# Allegro board Templet_16x.brd
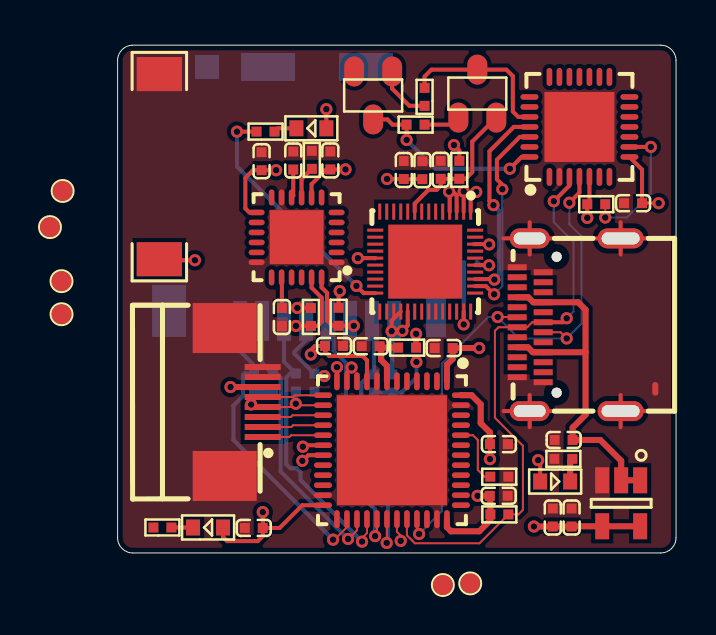
[diagram p0: board, top side]
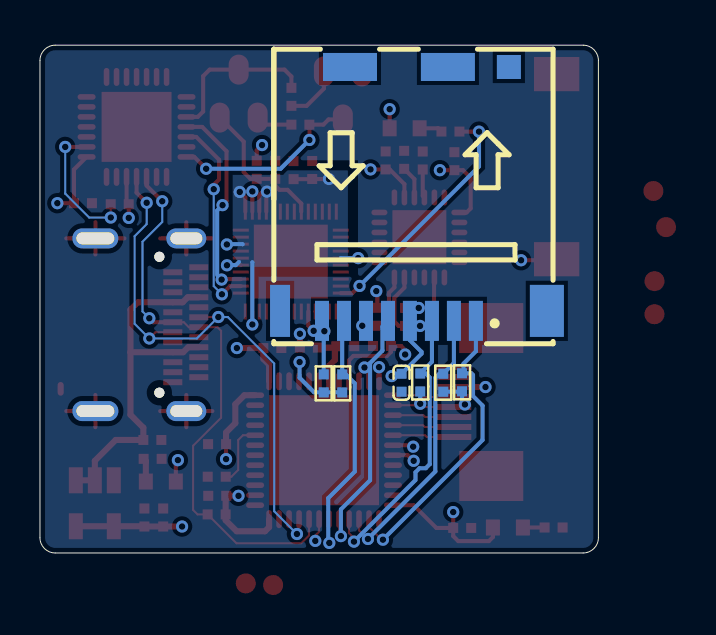
[diagram p1: board, bottom side, seen from below]

Outline 27.94 x 25.4 mm; copper layers: TOP, 3V3, GND, BOTTOM. Coordinates in mm from the lower left corner of the outline.
Outline path: 0,24.64 0,0.76 arc(0.22,0.22) 0.76,0 27.18,0 arc(27.72,0.22) 27.94,0.76 27.94,24.64 arc(27.72,25.18) 27.18,25.4 0.76,25.4 arc(0.22,25.18) 0,24.64

## Placement (name value [footprint] x y rotation side)
C1  0.1uf  [C0402]  21.77 1.77 90 top
C2  0.1uf  [C0402]  22.32 5.65 180 top
C3  10uf  [C0402]  22.71 1.77 90 top
C4  1uF  [C0402]  14.32 19.16 90 top
C5  0.1uf  [C0402]  15.25 19.15 90 top
C6  0.1uf  [C0402]  25.79 17.5 0 top
C7  0.1uf  [C0402]  16.17 19.17 90 top
C8  0.1uf  [C0402]  19.07 2.86 0 top
C9  0.1uf  [C0402]  10.83 10.35 0 top
C10  0.1uf  [C0402]  6.81 1.25 180 top
C11  0.1uf  [C0402]  16.31 10.25 180 top
C12  0.1uf  [C0402]  19.08 5.44 0 top
C13  2.2uF  [C0402]  8.22 11.8 90 top
C14  0.1uf  [C0402]  10.64 19.64 90 top
C15  0.1uf  [C0402]  12.66 10.34 180 top
C16  10nF  [C0402]  7.2 19.6 90 top
C17  0.1uf  [C0402]  8.79 19.63 90 top
C18  0.1uf  [C0402]  9.85 8.52 90 bottom
D1  LED  [LED0603]  9.69 21.24 180 top
D2  LED  [LED0603]  4.53 1.27 180 top
D3  LED  [LED0603]  21.89 3.57 0 top
J1  ANT  [ANT-SMD_L9_5-W2_1]  2.09 19.32 90 top
J2  HEADER 10  [FPC-SMD_KH-FG0_5-H2_0-8PIN]  6.31 7.55 90 top
J3  HEADER 1  [TPC_1R00]  -2.81 13.6 0 top
J4  HEADER 1  [TPC_1R00]  -2.8 11.94 0 top
J5  HEADER 1  [TPC_1R00]  17.64 -1.52 0 top
J6  HEADER 1  [TPC_1R00]  16.27 -1.6 0 top
J7  HEADER 1  [TPC_1R00]  -3.38 16.3 0 top
J8  HEADER 1  [TPC_1R00]  -2.75 18.11 0 top
Q1  NPN BCE  [SOT23_3L]  18 22.98 0 top
Q2  NPN BCE  [SOT23_3L]  12.79 22.89 180 top
R1  10K  [R0402]  17.1 19.17 270 top
R2  10K  [R0402]  23.95 17.44 0 top
R3  10K  [R0402]  14.91 21.43 0 top
R4  200R  [R0402]  7.4 21.08 180 top
R5  10K  [R0402]  15.36 22.82 270 top
R6  200R  [R0402]  2.24 1.27 180 top
R7  200R  [R0402]  22.3 4.71 180 top
R8  10K  [R0402]  19.1 3.81 0 top
R9  4.7K  [R0402]  9.67 11.81 270 top
R10  4.7K  [R0402]  11.06 11.82 270 top
R11  4.7K  [R0402]  19.1 1.93 180 top
R12  10K  [R0402]  14.48 10.27 180 top
R13  4.7K  [R0402]  9.72 19.66 90 top
R14  4.7K  [R0402]  6.82 8.53 270 bottom
R15  4.7K  [R0402]  7.76 8.52 270 bottom
R16  4.7K  [R0402]  8.92 8.53 270 bottom
R17  4.7K  [R0402]  12.82 8.48 270 bottom
R18  4.7K  [R0402]  13.74 8.48 270 bottom
U1  -  [SOT23-5]  25.2 2.48 180 top
U2  type-c-24p  [USB-C-SMD_TYPE-C-24P-QT]  22.58 11.42 90 top
U3  cp2102  [QFN-28_L5_0-W5_0-P0_50-BL-EP]  23.11 21.31 0 top
U4  ESP32-DOWD  [QFN-48_L5_0-W5_0-P0_35-BL-EP3_7]  15.39 14.57 180 top
U5  STM32F411xD/Exx UFQFPN48  [UFQFPN-48_L7_0-W7_0-P0_50-BL-EP]  13.73 5.14 180 top
U6  MPU6050  [QFN-24_L4_0-W4_0-P0_50-BL-EP2_7]  8.96 15.78 90 top
U7  TF/MicroSD  [TF-SMD_DM3CS-SF]  9.25 17.96 180 bottom

## Library data of the parts
C1-C12 = CAP NP: signal model: CAP_0402_1.01UF_16V_C0402_100NF_100nF
C13-C18 = CAP NP
D1-D3 = LED
J1 = HEADER 2
J2 = HEADER 10
J3-J8 = HEADER 1
Q1 Q2 = NPN BCE
R1-R18 = R
U1 = SOT23-5
U2 = type-c-24p
U3 = cp2102
U4 = ESP32-DOWD
U5 = STM32F401xD/Exx UFQFPN48
U6 = MPU6050
U7 = TF/MicroSD

## Footprints (pads in the part's own frame, mm; a bottom-side part is the same pattern mirrored in y, then rotated)
ANT-SMD_L9_5-W2_1
  rect 1.71x2.268 smd: 1(-4.63,0) 2(4.63,0)
C0402
  rect 0.5x0.5 smd: 1(-0.45,0) 2(0.45,0)
FPC-SMD_KH-FG0_5-H2_0-8PIN
  rect 0.3x1.8 smd: 1(-1.75,-0.95) 2(-1.25,-0.95) 3(-0.75,-0.95) 4(-0.25,-0.95) 5(0.25,-0.95) 6(0.75,-0.95) 7(1.25,-0.95) 8(1.75,-0.95)
  rect 2.5x3.2 smd: 9(3.7,0.95) 10(-3.7,0.95)
LED0603
  rect 0.7x0.8 smd: 1(-0.75,0) 2(0.75,0)
QFN-24_L4_0-W4_0-P0_50-BL-EP2_7
  oval 0.28x0.8 smd: 1(-1.25,-2) 2(-0.75,-2) 3(-0.25,-2) 4(0.25,-2) 5(0.75,-2) 6(1.25,-2) 13(1.25,2) 14(0.75,2) 15(0.25,2) 16(-0.25,2) 17(-0.75,2) 18(-1.242,2)
  oval 0.8x0.28 smd: 7(2,-1.25) 8(2,-0.75) 9(2,-0.25) 10(2,0.25) 11(2,0.75) 12(2,1.25) 19(-2,1.25) 20(-2,0.75) 21(-2,0.25) 22(-2,-0.25) 23(-2,-0.75) 24(-2,-1.25)
  rect 2.7x2.7 smd: 25(0.012,0)
QFN-28_L5_0-W5_0-P0_50-BL-EP
  oval 0.28x0.9 smd: 1(-1.501,-2.5) 2(-1.001,-2.5) 3(-0.5,-2.5) 4(0,-2.5) 5(0.5,-2.5) 6(1.001,-2.5) 7(1.501,-2.5) 15(1.501,2.5) 16(1.001,2.5) 17(0.5,2.5) 18(0,2.5) 19(-0.5,2.5) 20(-1.001,2.5) 21(-1.501,2.5)
  oval 0.9x0.28 smd: 8(2.5,-1.501) 9(2.5,-1.001) 10(2.5,-0.5) 11(2.5,0) 12(2.5,0.5) 13(2.5,1.001) 14(2.5,1.501) 22(-2.5,1.501) 23(-2.5,1.001) 24(-2.5,0.5) 25(-2.5,0) 26(-2.5,-0.5) 27(-2.5,-1.001) 28(-2.5,-1.501)
  rect 3.5x3.5 smd: 29(0,0)
QFN-48_L5_0-W5_0-P0_35-BL-EP3_7
  rect 0.15x0.8 smd: 1(-2.275,-2.5) 2(-1.925,-2.5) 3(-1.575,-2.5) 4(-1.225,-2.5) 5(-0.875,-2.5) 6(-0.525,-2.5) 7(-0.175,-2.5) 8(0.175,-2.5) 9(0.525,-2.5) 10(0.875,-2.5) 11(1.225,-2.5) 12(1.575,-2.5) 13(1.925,-2.5) 14(2.275,-2.5) 25(2.275,2.5) 26(1.925,2.5) 27(1.575,2.5) 28(1.225,2.5) 29(0.875,2.5) 30(0.525,2.5) 31(0.175,2.5) 32(-0.175,2.5) 33(-0.525,2.5) 34(-0.875,2.5) 35(-1.225,2.5) 36(-1.575,2.5) 37(-1.925,2.5) 38(-2.275,2.5)
  rect 0.8x0.15 smd: 15(2.5,-1.575) 16(2.5,-1.225) 17(2.5,-0.875) 18(2.5,-0.525) 19(2.5,-0.175) 20(2.5,0.175) 21(2.5,0.525) 22(2.5,0.875) 23(2.5,1.225) 24(2.5,1.575) 39(-2.5,1.575) 40(-2.5,1.225) 41(-2.5,0.875) 42(-2.5,0.525) 43(-2.5,0.175) 44(-2.5,-0.175) 45(-2.5,-0.525) 46(-2.5,-0.875) 47(-2.5,-1.225) 48(-2.5,-1.575)
  rect 3.7x3.7 smd: 49(0,0)
R0402
  rect 0.5x0.5 smd: 1(-0.45,0) 2(0.45,0)
SOT23-5
  rect 0.7x1.3 smd: 1(-0.95,-1.15) 2(0,-1.15) 3(0.95,-1.15) 4(0.95,1.15) 5(-0.95,1.15)
SOT23_3L
  oval 1x1.5 smd: 1(-0.95,-1.2) 2(0.95,-1.2) 3(0,1.2)
TF-SMD_DM3CS-SF
  rect 0.7x2 smd: 1(3.125,-6.35) 2(2.025,-6.35) 3(0.925,-6.35) 4(-0.177,-6.35) 5(-1.275,-6.35) 6(-2.375,-6.35) 7(-3.475,-6.35) 8(-4.575,-6.35)
  rect 2.7x1.4 smd: 9(1.724,6.35) 12(-3.176,6.35)
  rect 1.7x2.6 smd: 10(6.675,-5.851)
  rect 1x2.6 smd: 11(-6.675,-5.851)
  rect 1.2x1.2 smd: 13(4.775,6.35)
TPC_1R00
  round 1 smd: 1(0,0)
UFQFPN-48_L7_0-W7_0-P0_50-BL-EP
  oval 0.28x0.9 smd: 1(-2.751,-3.449) 2(-2.25,-3.449) 3(-1.75,-3.449) 4(-1.249,-3.449) 5(-0.749,-3.449) 6(-0.249,-3.449) 7(0.249,-3.449) 8(0.75,-3.449) 9(1.25,-3.449) 10(1.75,-3.449) 11(2.251,-3.449) 12(2.751,-3.449) 25(2.751,3.449) 26(2.251,3.449) 27(1.75,3.449) 28(1.25,3.449) 29(0.75,3.449) 30(0.249,3.449) 31(-0.249,3.449) 32(-0.749,3.449) 33(-1.249,3.449) 34(-1.75,3.449) 35(-2.25,3.449) 36(-2.751,3.449)
  oval 0.9x0.28 smd: 13(3.45,-2.751) 14(3.45,-2.25) 15(3.45,-1.75) 16(3.45,-1.25) 17(3.45,-0.749) 18(3.45,-0.249) 19(3.45,0.249) 20(3.45,0.749) 21(3.45,1.25) 22(3.45,1.75) 23(3.45,2.25) 24(3.45,2.751) 37(-3.449,2.751) 38(-3.449,2.25) 39(-3.449,1.75) 40(-3.449,1.25) 41(-3.449,0.749) 42(-3.449,0.249) 43(-3.449,-0.249) 44(-3.449,-0.749) 45(-3.449,-1.25) 46(-3.449,-1.75) 47(-3.449,-2.25) 48(-3.449,-2.751)
  rect 5.5x5.5 smd: 49(0,0)
USB-C-SMD_TYPE-C-24P-QT
  round 0.5 hole 0.5: (-3.4,0.613) (3.4,0.613)
  oval 1x2 hole 0.6x1.6: 1(-4.32,1.962) 2(4.32,1.962)
  oval 1x2.3 hole 0.6x1.9: 3(4.32,-2.587) 4(-4.32,-2.587)
  rect 0.3x0.95 smd: A1(-2.625,2.587) A2(-2.125,2.587) A3(-1.625,2.587) A4(-1.125,2.587) A5(-0.625,2.587) A6(-0.125,2.587) A7(0.375,2.587) A8(0.875,2.587) A9(1.375,2.587) A10(1.875,2.587) A11(2.375,2.587) A12(2.875,2.587) B1(2.625,1.288) B2(2.125,1.288) B3(1.625,1.288) B4(1.125,1.288) B5(0.625,1.288) B6(0.125,1.288) B7(-0.375,1.288) B8(-0.875,1.288) B9(-1.375,1.288) B10(-1.875,1.288) B11(-2.375,1.288) B12(-2.875,1.288)

## Nets
3V3: C1.1 C3.1 C4.1 C5.1 C6.2 C8.1 C9.1 C10.1 C11.1 C12.1 C14.1 C16.1 C18.2 D1.1(+) D2.1(+) D3.1(+) J2.6 J7.1 R1.1 R2.1 R9.1 R10.1 R11.2 R12.1 R14.2 R15.2 R16.2 R17.2 R18.2 U1.4(OUT) U1.5(FB) U3.5(D-) U3.6(VDD) U3.8(VBUS) U4.1(VDDA#1) U4.3(VDD3P3#3) U4.4(VDD3P3#4) U4.19(VDD3P3_RTC) U4.37(VDD3P3_CPU) U4.43(VDDA#43) U4.46(VDDA#46) U5.1(VBAT) U5.9(VDDA/VREF+) U5.24(VDD#24) U5.36(VDD#36) U5.48(VDD#48) U6.8(VLOGIC) U6.13(VDD) U7.4(VDD)
GND: C1.2 C2.2 C3.2 C4.2 C5.2 C6.1 C7.2 C8.2 C9.2 C10.2 C11.2 C12.2 C13.1 C14.2 C15.2 C16.2 C17.2 C18.1 J1.2 J2.7 J2.8 J2.9 J2.10 J8.1 R7.2 R8.2 R13.2 U1.3(GND) U2.1(EP#1) U2.2(EP#2) U2.3(EP#3) U2.4(EP#4) U2.A1(GND#A1) U2.A12(GND#A12) U2.B1(GND#B1) U2.B12(GND#B12) U3.2(RI) U3.29(HEAT_TAB) U5.8(VSSA/VREF-) U5.23(VSS#23) U5.35(VSS#35) U5.47(VSS#47) U5.49(GND) U6.1(CLKIN) U6.11(FSYNC) U6.18(GND#18) U6.25(GND#25) U7.6(VSS) U7.10 U7.11 U7.12 U7.13
VDD_5V: C2.1 U1.1(IN) U1.2(EN) U2.A4(VBUS#A4) U2.A9(VBUS#A9) U2.B4(VBUS#B4) U2.B9(VBUS#B9)
BLK: J2.1 U5.17(PA7)
CC1: U2.A5(CC1)
CC2: U2.B5(CC2)
DC: J2.2 U5.16(PA6)
DTR: Q2.3(E) R3.1 U3.28(DTR)
E32_IO4: R4.2 U4.24(GPIO4)
E32_U0RXD: U3.26(TXD) U4.40(U0RXD)
E32_U0TXD: U3.25(RXD) U4.41(U0TXD)
E32_U1RXD: J4.1 U4.28(SD_DATA_2) U5.12(PA2)
E32_U1TXD: J3.1 U4.29(SD_DATA_3) U5.11(PA1)
EN: C7.1 Q1.2(C) R1.2 U4.9(CHIP_PU)
GPIO0: Q2.2(C)
MPU_SCL: R9.2 U5.19(PB1) U6.23(SCL)
MPU_SDA: R10.2 U5.18(PB0) U6.24(SDA)
RES: J2.3 U5.15(PA5)
RESV1: U6.22(RESV1)
RESV2: U6.21(RESV2)
RESV3: U6.19(RESV3)
RTS: Q1.3(E) R5.1 U3.24(RTS)
RX1+: U2.B11(RX1+)
RX1-: U2.B10(RX1-)
RX2+: U2.A11(RX2+)
RX2-: U2.A10(RX2-)
SCL: J2.5 U5.13(PA3)
SDA: J2.4 U5.14(PA4)
SDIO_CLK: U5.29(PA8) U7.5(CLK)
SDIO_CMD: R16.1 U5.28(PB15) U7.3(CMD)
SDIO_D0: R17.1 U5.30(PA9) U7.7(DATA0)
SDIO_D1: R18.1 U5.31(PA10) U7.8(DATA1)
SDIO_D2: R14.1 U5.26(PB13) U7.1(DAT2)
SDIO_D3: R15.1 U5.27(PB14) U7.2(DATA3/CD)
ST_PA14: R6.2
ST_SWCLK: J5.1 U5.37(PA14)
ST_SWDIO: J6.1 U5.34(PA13)
SUB1: U2.A8(SUB1)
SUB2: U2.B8(SUB2)
TX1+: U2.A2(TX1+)
TX1-: U2.A3(TX1-)
TX2+: U2.B2(TX2+)
TX2-: U2.B3(TX2-)
USB-D+: U2.A7(D-#A7) U2.B7(D-#B7) U3.4(D+) U5.33(PA12)
USB-D-: R11.1 U2.A6(D+#A6) U2.B6(D+#B6) U3.3(GND) U5.32(PA11)
N05093: R2.2 U3.9(RST)
N06006: J1.1 U4.2(LAN_IN)
N16435: Q1.1(B) R3.2
N16447: Q2.1(B) R5.2
N22150: C15.1 R12.2 U5.7(NRST)
N26946: C13.2 U6.20(CPOUT)
N28132: C17.1 U6.10(REGOUT)
N29778: R13.1 U6.9(AD0)
N53835: D1.2(-) R4.1
N53839: D2.2(-) R6.1
N53846: D3.2(-) R7.1
N101946: R8.1 U5.44(BOOT0)

Pads without a net: U3 1 7 10 11 12 13 14 15 16 17 18 19 20 21 22 23 27; U4 5 6 7 8 10 11 12 13 14 15 16 17 18 20 21 22 23 25 26 27 30 31 32 33 34 35 36 38 39 42 44 45 47 48 49; U5 2 3 4 5 6 10 20 21 22 25 38 39 40 41 42 43 45 46; U6 2 3 4 5 6 7 12 14 15 16 17; U7 9

## Via types
v1: diameter 0.61, hole 0.33, TOP to BOTTOM, 60 vias

## Routing (per net, layer and track width the routed paths; a pad name or vN(x,y) marks a point on that pad's centre or on a via; arc(x,y) is an arc through that point)
3V3: length 71
  TOP w0.203: D1.1 v1(10.44,22.2) ; C5.1 14.33,18.7 C4.1 v1(13.48,18.71) ; U4.3 16.97,17.89 16.78,18.07 v1(16.58,18.07) 16.62,18.04 U4.4 ; U3.5 23.61,17.55 R2.1 v1(23.5,16.76) ; v1(11.4,19.19) C14.1 10.44,19.19 9.71,18.45 U6.8 ; C10.1 7.26,0.84 7.01,0.59 5.48,0.59 5.28,0.8 D2.1 ; C10.1 8.11,1.25 9.24,2.39 U5.24 ; C10.1 v1(7.26,2.05) ; v1(18.58,14.39) 18.58,14.4 U4.43 ; R10.1 11.06,13.05 v1(11.11,13.1) ; R9.1 v1(8.99,12.26) ; U4.46 18.57,15.45 v1(18.59,15.43) ; v1(21.04,4.64) 21.14,4.54 D3.1 ; v1(27.07,17.5) C6.2 26.24,19.18 U3.8 ; U4.19 v1(12.02,14.75) ; v1(16.83,20.41) 17.1,20.14 R1.1 ; U4.1 17.67,17.78 v1(17.94,18.06) ; C12.1 v1(18.63,4.69) ; U5.9 12.48,9.64 12.26,9.86 10.58,9.86 10.38,10.06 C9.1 9.87,10.35 9.67,10.15 v1(9.67,9.93) ; v1(7.93,19.15) C16.1 6.77,19.15 6.39,18.77 6.39,17.24 6.59,17.03 U6.13 ; U4.37 v1(17.32,11.43)
  TOP w0.305: v1(20.83,1.32) C1.1 C3.1 22.73,1.33 U1.4 U1.5 ; J2.6 v1(5.65,8.3) ; C12.1 18.63,6.03 18.17,6.49 18.17,7.44 17.71,7.89 U5.48 ; U5.36 16.48,1.29 16.68,1.09 18.1,1.09 18.65,1.64 R11.2 18.65,2.83 C8.1 v1(18.01,2.86) ; R12.1 v1(14.93,10.96) ; v1(18.09,10.25) C11.1 16.76,9.71 16.48,9.42 U5.1
  BOTTOM w0.203: 17.8,15.44 17.81,15.45 18.57,15.45 v1(18.59,15.43) ; R16.2 v1(8.92,7.46) ; 17.98,14.56 18.14,14.4 18.58,14.4 v1(18.58,14.39) ; v1(10.34,8.85) 10.17,8.85 10.05,8.97 C18.2 8.85,9.97 8.85,10.06 9.43,10.64 U7.4 ; v1(6.68,7.43) 6.82,7.57 R14.2 6.84,8.07 R15.2 ; v1(12.02,14.75) 12.88,14.75 12.89,14.75 ; 17.31,14.54 17.32,14.54 v1(17.32,11.43) ; v1(14.95,9.55) 14.95,8.77 14.22,8.03 R18.2 13.74,8.03 R17.2
GND: length 33.9
  TOP w0.203: U2.2 21.92,15.74 ; U2.2 20.62,14.93 ; U2.2 19.31,15.74 ; U2.2 20.62,16.54 ; 19.31,7.1 U2.1 ; U2.1 21.92,7.1 ; U2.1 20.62,7.9 ; U2.1 20.62,6.29 ; U2.3 25.17,16.54 ; U2.3 23.71,15.74 ; U2.3 26.62,15.74 ; U2.3 25.17,14.93 ; U2.4 25.17,7.9 ; U2.4 26.62,7.1 ; U2.4 25.17,6.29
  TOP w0.305: 26.9,8.02 26.9,8.4
  GND w0.203: 23.71,7.1 U2.4 ; U2.4 25.17,7.9 ; U2.4 25.17,6.29 ; U2.4 26.62,7.1 ; U2.1 21.92,7.1 ; U2.1 19.31,7.1 ; U2.1 20.62,7.9 ; U2.1 20.62,6.29 ; U2.2 20.62,16.54 ; U2.2 21.92,15.74 ; U2.2 20.62,14.93 ; U2.2 19.31,15.74 ; 25.17,14.93 U2.3 ; U2.3 25.17,16.54 ; U2.3 26.62,15.74 ; U2.3 23.71,15.74
VDD_5V: length 18.8
  TOP w0.305: U1.1 U1.2 25.2,4.61 24.15,5.65 C2.1 22.77,6.27 23.41,6.91 23.41,10.04 ; 23.41,10.04 U2.B9 20.77,10.04 20.52,10.29 U2.A4 ; 23.41,10.04 23.41,12.17 23.04,12.54 U2.B4 20.8,12.54 20.55,12.79 U2.A9
BLK: length 3.1
  TOP w0.102: J2.1 8.59,5.8 8.68,5.89 U5.17
DC: length 3.1
  TOP w0.102: U5.16 8.78,6.39 8.69,6.3 J2.2
DTR: length 9.5
  TOP w0.203: Q2.3 13.5,21.69 13.76,21.43 R3.1 v1(14.46,20.66) ; v1(19.63,19.22) 20.22,19.81 U3.28
  BOTTOM w0.203: v1(14.46,20.66) 15.9,19.22 v1(19.63,19.22)
E32_IO4: length 12.3
  TOP w0.203: v1(11.95,13.36) 12.31,13 U4.24 ; v1(5.97,21.08) 6.95,21.08 R4.2
  BOTTOM w0.203: v1(5.97,21.08) 5.97,19.33 v1(11.95,13.36)
E32_U0RXD: length 10.2
  TOP w0.203: U3.26 20.12,20.81 18.98,19.67 18.98,18.69 19.25,18.42 v1(19.25,18.2) ; v1(18.84,12.94) 18.43,13.35 U4.40
  BOTTOM w0.102: v1(19.25,18.2) 19.25,13.35 v1(18.84,12.94)
E32_U0TXD: length 10.2
  TOP w0.203: U4.41 18.83,13.7 18.85,13.68 v1(18.85,13.68) ; v1(18.81,17.4) 18.6,17.6 18.6,20.09 19.82,21.31 U3.25
  BOTTOM w0.102: 19.07,13.9 v1(18.85,13.68)
  BOTTOM w0.203: 19.07,13.9 19.07,17.13 v1(18.81,17.4)
E32_U1RXD: length 5.4
  TOP w0.203: v1(13.71,11.09) 13.71,11.62 U4.28 ; U5.12 v1(10.98,9.29)
  GND w0.203: v1(13.71,11.09) 11.91,9.29 v1(10.98,9.29)
E32_U1TXD: length 5.2
  TOP w0.203: U5.11 11.48,9.01 11.71,9.24 v1(11.71,9.28) ; U4.29 14.52,11.38 v1(14.25,11.11)
  GND w0.203: v1(14.25,11.11) 13.76,11.11 11.92,9.28 v1(11.71,9.28)
EN: length 7.4
  TOP w0.203: Q1.2 17.75,20.58 17.75,19.05 17.41,18.72 R1.2 17.1,18.71 C7.1 16.17,18.37 15.96,18.17 15.55,18.17 14.87,17.48 U4.9
MPU_SCL: length 12.1
  TOP w0.203: v1(8.92,11.36) R9.2 9.99,11.36 10.21,11.58 10.21,12.77 9.71,13.27 U6.23 ; v1(9.24,4.61) 9.27,4.61 9.55,4.89 U5.19
  GND w0.203: v1(8.92,11.36) 8.64,11.08 8.64,5.21 v1(9.24,4.61)
MPU_SDA: length 11.9
  TOP w0.203: v1(9.27,5.32) 9.34,5.39 U5.18 ; U6.24 10.21,13.28 10.48,13.01 10.48,11.63 10.75,11.37 R10.2 v1(11.82,11.37)
  GND w0.203: v1(11.82,11.37) 9.27,8.82 v1(9.27,5.32)
RES: length 3.1
  TOP w0.102: U5.15 8.76,6.89 8.67,6.8 J2.3
RTS: length 8
  TOP w0.203: U3.24 20.04,21.81 19.78,22.08 19.78,23.85 19.45,24.18 Q1.3 15.71,24.18 15.36,23.83 R5.1
SCL: length 3.1
  TOP w0.102: J2.5 8.78,7.8 8.87,7.89 U5.13
SDA: length 3.1
  TOP w0.102: J2.4 8.78,7.3 8.87,7.39 U5.14
SDIO_CLK: length 12.7
  TOP w0.102: U5.29 12.98,0.87 12.95,0.84 v1(12.88,0.84)
  BOTTOM w0.203: U7.5 10.81,11.33 10.81,10.12 11.42,9.5 11.42,3.64 12.88,2.18 v1(12.88,0.84)
SDIO_CMD: length 14.6
  TOP w0.102: v1(12.23,0.57) 12.23,0.75 12.48,0.99 U5.28
  BOTTOM w0.203: U7.3 8.33,9.56 R16.1 8.64,8.98 8.44,8.77 8.44,4.44 8.64,4.24 8.95,4.24 9.15,4.04 9.15,3.65 v1(12.23,0.57)
SDIO_D0: length 13.3
  TOP w0.102: U5.30 13.48,0.52 v1(13.46,0.5)
  BOTTOM w0.203: v1(13.46,0.5) 13.52,0.56 13.52,2.74 12.19,4.07 12.19,8.48 12.64,8.93 R17.1 12.82,11.52 U7.7
SDIO_D1: length 12.5
  TOP w0.102: U5.31 13.98,1.06 14.16,0.87 v1(14.16,0.6)
  3V3 w0.203: 13.75,8.96 13.79,8.92 13.96,8.92 14.16,8.72 v1(14.16,0.6)
  BOTTOM w0.203: R18.1 13.74,11.52 U7.8
SDIO_D2: length 15.4
  TOP w0.102: v1(10.78,0.66) 10.85,0.66 11.48,1.29 U5.26
  BOTTOM w0.203: v1(10.78,0.66) 5.79,5.65 5.79,7.37 6.27,7.85 6.27,8.9 6.36,8.98 R14.1 6.75,9.06 6.75,9.47 6.13,10.09 U7.1
SDIO_D3: length 14
  TOP w0.102: U5.27 11.98,1.13 11.61,0.77 11.6,0.77 v1(11.53,0.7)
  BOTTOM w0.203: U7.2 7.23,9.5 R15.1 7.96,8.97 8.16,8.76 8.16,4.07 v1(11.53,0.7)
USB-D+: length 28.6
  TOP w0.102: v1(15.08,0.95) 14.98,1.06 U5.33 ; U2.B7 22.16,11.04 v1(22.47,10.73) ; v1(19.02,11.8) 19.98,11.8 U2.A7
  TOP w0.203: v1(22.6,17.52) 23.11,18.02 U3.4
  BOTTOM w0.102: v1(15.08,0.95) 16.22,2.09 16.22,9.48 18.54,11.8 v1(19.02,11.8) 20.09,10.73 v1(22.47,10.73) 23.21,11.47 23.21,15.84 22.6,16.45 v1(22.6,17.52)
USB-D-: length 28.8
  TOP w0.102: U5.32 14.48,0.88 14.87,0.48 18.11,0.48 R11.1 20.06,1.93 20.28,2.15 20.28,5.36 18.88,6.76 18.88,11.11 19.06,11.29 U2.A6 20.49,11.29 20.74,11.54 U2.B6
  TOP w0.203: U3.3 22.61,18.38 v1(21.82,17.59) ; v1(22.47,11.74) 22.27,11.54 U2.B6
  BOTTOM w0.102: v1(22.47,11.74) 22.81,12.08 22.81,15.57 21.82,16.56 v1(21.82,17.59)
N05093: length 6.8
  TOP w0.102: R2.2 v1(24.4,16.78)
  TOP w0.203: U3.9 v1(26.68,20.31)
  BOTTOM w0.102: v1(26.68,20.31) 26.68,17.98 25.48,16.78 v1(24.4,16.78)
N06006: length 18.3
  TOP w0.203: U4.2 v1(17.32,18.09) ; v1(3.87,14.64) 2.14,14.64 J1.1
  GND w0.203: v1(3.87,14.64) 8.02,18.79 16.62,18.79 17.32,18.09 v1(17.32,18.09)
N16435: length 1.8
  TOP w0.203: R3.2 16.7,21.43 Q1.1
N16447: length 2.8
  TOP w0.203: R5.2 14.6,22.37 13.74,23.23 Q2.1
N22150: length 2.8
  TOP w0.203: 13.18,10.27 C15.1
  TOP w0.305: U5.7 13.48,9.36 13.18,9.65 13.18,10.27 R12.2
N26946: length 1.5
  TOP w0.203: C13.2 8.22,13.77 U6.20
N28132: length 1.4
  TOP w0.203: U6.10 8.79,17.87 C17.1
N29778: length 1.6
  TOP w0.203: U6.9 9.21,18.7 R13.1
N53835: length 1.2
  TOP w0.203: D1.2 8.02,21.24 R4.1
N53839: length 1.1
  TOP w0.203: D2.2 R6.1
N53846: length 1.2
  TOP w0.305: D3.2 22.64,4.6 R7.1
N101946: length 3.2
  TOP w0.102: U5.44 17.78,5.89 18.02,5.65 18.02,4.15 18.36,3.81 R8.1

## Copper pours and planes (outline as drawn; the poured copper is in the pictures)
3V3 on BOTTOM: 12.54,19.14 12.54,14.32 18.3,14.32 18.3,19.14
3V3 on 3V3: 0.76,0.25 0.4,0.4 0.25,0.76 0.25,24.64 0.4,25 0.76,25.15 27.18,25.15 27.54,25 27.69,24.64 27.69,0.76 27.54,0.4 27.18,0.25
GND on TOP, GND: 0.76,0.25 0.4,0.4 0.25,0.76 0.25,24.64 0.4,25 0.76,25.15 27.18,25.15 27.54,25 27.69,24.64 27.69,0.76 27.54,0.4 27.18,0.25
Net_5 on BOTTOM: 0.76,0.25 0.4,0.4 0.25,0.76 0.25,24.64 0.4,25 0.76,25.15 27.18,25.15 27.54,25 27.69,24.64 27.69,0.76 27.54,0.4 27.18,0.25
